# EAGLE board me433_test (EAGLE 8.1.0)

Size 160 x 100 mm. Coordinates in mm from the lower left corner, seen from the top.
Outline: 0,0 160,0 160,100 0,100 0,0
Copper layers (1*16): Top 0.035mm / dielectric 1.5mm / Bottom 0.035mm
Design rules "default": minimum track width 10mil, minimum drill 24mil, track to track 8mil, track to pad 8mil, pad to pad 8mil, via to via 8mil, smd to smd 8mil, copper to edge 40mil, drill to drill 8mil, minimum pad ring 10mil, minimum via ring 8mil, stop-mask expansion 4mil, vias tented up to drill 0mil, thermal gap 10mil

## Footprints (pad centres in the part's own frame; a part is rotated, then mirrored left to right if it is on the bottom)
C025-025X050 = drill 0.813 octagon: 1 -1.27,0; 2 1.27,0
B45181B = drill 0.813: + -2.54,0 | drill 0.813 octagon: - 2.54,0
USB-MB-H = drill 0.8: D+ 5.1,0; D- 3.9,0.8; GND 5.1,-1.6; ID 3.9,-0.8; VBUS 5.1,1.6 | drill 1.9: P$6 0,-3.65; P$7 0,3.65
LED3MM = drill 0.813 octagon: A -1.27,0; K 1.27,0
0207/10 = drill 0.813 octagon: 1 -5.08,0; 2 5.08,0
DIL28-3 = drill 0.813 long: 1 -16.51,-3.81; 2 -13.97,-3.81; 3 -11.43,-3.81; 4 -8.89,-3.81; 5 -6.35,-3.81; 6 -3.81,-3.81; 7 -1.27,-3.81; 8 1.27,-3.81; 9 3.81,-3.81; 10 6.35,-3.81; 11 8.89,-3.81; 12 11.43,-3.81; 13 13.97,-3.81; 14 16.51,-3.81; 15 16.51,3.81; 16 13.97,3.81; 17 11.43,3.81; 18 8.89,3.81; 19 6.35,3.81; 20 3.81,3.81; 21 1.27,3.81; 22 -1.27,3.81; 23 -3.81,3.81; 24 -6.35,3.81; 25 -8.89,3.81; 26 -11.43,3.81; 27 -13.97,3.81; 28 -16.51,3.81
SLIDE = drill 1: P$4 -4,0; P$5 4,0 | drill 0.8: PIN1 -2,0; PIN2 0,0; PIN3 2,0
TO92 = drill 0.813 octagon: 1 -1.27,0; 2 0,1.905; 3 1.27,0
PB = drill 1.016 pad 1.88: 1 -2.54,0; 2 2.54,0
1X08 = drill 1.016 pad 1.88: 1 0,0; 2 2.54,0; 3 5.08,0; 4 7.62,0; 5 10.16,0; 6 12.7,0; 7 15.24,0; 8 17.78,0
1X05 = drill 1.016 pad 1.88: 1 0,0; 2 2.54,0; 3 5.08,0; 4 7.62,0; 5 10.16,0
OSC = drill 1.016 pad 1.88: 1 -2.54,0; 2 0,0; 3 2.54,0

## Placement (x,y rotation side)
C1  0.1  [C025-025X050]  -36.83,26.67 0 top  (outside the outline)
C2  0.1  [C025-025X050]  -43.18,26.67 0 top  (outside the outline)
C3  0.1  [C025-025X050]  -49.53,26.67 0 top  (outside the outline)
C4  10  [B45181B]  -33.02,15.24 0 top  (outside the outline)
C5  10  [B45181B]  -44.45,15.24 0 top  (outside the outline)
C6  0.1  [C025-025X050]  -15.24,34.29 0 top  (outside the outline)
J1  USB-MB-H  [USB-MB-H]  -21.59,17.78 0 top  (outside the outline)
LED1  RED  [LED3MM]  -30.48,57.15 0 top  (outside the outline)
LED2  GREEN  [LED3MM]  -21.59,57.15 0 top  (outside the outline)
R1  330  [0207/10]  -43.18,44.45 0 top  (outside the outline)
R2  330  [0207/10]  -19.05,50.8 0 top  (outside the outline)
R3  10K  [0207/10]  -31.75,50.8 0 top  (outside the outline)
R4  10K  [0207/10]  -44.45,50.8 0 top  (outside the outline)
U$1  PIC32MX250F128B  [DIL28-3]  -31.75,6.35 0 top  (outside the outline)
U$2  SLIDESLIDE  [SLIDE]  -29.21,25.4 0 top  (outside the outline)
U$3  MCP1702  [TO92]  -34.29,45.72 0 top  (outside the outline)
U$4  PB  [PB]  -25.4,33.02 0 top  (outside the outline)
U$5  PB  [PB]  -36.83,33.02 0 top  (outside the outline)
U$6  CONN_8  [1X08]  -31.75,40.64 0 top  (outside the outline)
U$7  CONN_8  [1X08]  -53.34,40.64 0 top  (outside the outline)
U$8  PICKIT3  [1X05]  -52.07,33.02 0 top  (outside the outline)
U$9  OSC  [OSC]  -17.78,45.72 0 top  (outside the outline)

## Library data of the parts
C1-C6 J1 R1-R4 U$1-U$9 = me433_lib
LED1 LED2 = led

## Nets
+3V3: C1.1 C5.+ C6.1 LED1.A R3.2 R4.2 U$1.13 U$1.23 U$1.28 U$7.2 U$8.5
+5V: C2.1 U$1.15 U$2.PIN3 U$3.2 U$6.2
A0: U$1.2 U$7.8
A1: U$1.3 U$7.7
A4/LED: LED2.A U$1.12 U$7.3
B2: U$1.6 U$7.6
B3: U$1.7 U$7.5
B4/USER: R4.1 U$1.11 U$5.1 U$7.4
B7: U$1.16 U$6.3
B8: U$1.17 U$6.4
B9: U$1.18 U$6.5
B13: U$1.24 U$6.6
B14: U$1.25 U$6.7
B15: U$1.26 U$6.8
D+: J1.D+ U$1.21
D-: J1.D- U$1.22
GND: C1.2 C2.2 C3.2 C4.- C5.- C6.2 J1.GND R1.1 R2.1 U$1.8 U$1.19 U$1.27 U$3.1 U$4.2 U$5.2 U$6.1 U$7.1 U$8.1 U$9.2
MCLR: R3.1 U$1.1 U$4.1 U$8.2
N$1: U$1.9 U$9.1
N$2: U$1.10 U$9.3
N$3: J1.VBUS U$2.PIN2
N$4: C4.+ U$1.20
N$5: C3.1 U$3.3
N$6: LED1.K R1.2
N$7: LED2.K R2.2
PGC: U$1.5 U$8.3
PGD: U$1.4 U$8.4
USBID: J1.ID U$1.14

## Tracks (layer width: path | path; a pad name or v marks a point on that pad's centre or on a via)
+3V3  (10 unrouted)
+5V  (4 unrouted)
A0  (1 unrouted)
A1  (1 unrouted)
A4/LED  (2 unrouted)
B2  (1 unrouted)
B3  (1 unrouted)
B4/USER  (3 unrouted)
B7  (1 unrouted)
B8  (1 unrouted)
B9  (1 unrouted)
B13  (1 unrouted)
B14  (1 unrouted)
B15  (1 unrouted)
D+  (1 unrouted)
D-  (1 unrouted)
GND  (18 unrouted)
MCLR  (3 unrouted)
N$1  (1 unrouted)
N$2  (1 unrouted)
N$3  (1 unrouted)
N$4  (1 unrouted)
N$5  (1 unrouted)
N$6  (1 unrouted)
N$7  (1 unrouted)
PGC  (1 unrouted)
PGD  (1 unrouted)
USBID  (1 unrouted)